# Altium PCB PCB.PcbDoc (part 3 of 4)
Units mm, origin at the board's own origin, x right, y up, seen from the top; angles counter-clockwise.
Board outline 90 x 90 mm, 4 copper layers (Top Layer (Signal), Int1 (GND), Int2 (Signal), Bottom Layer (Signal)), stack 1.586 mm thick; 151 components, 306 nets, 1178 pads, 350 vias.
Unrouted connection lines stored in the file: 80.
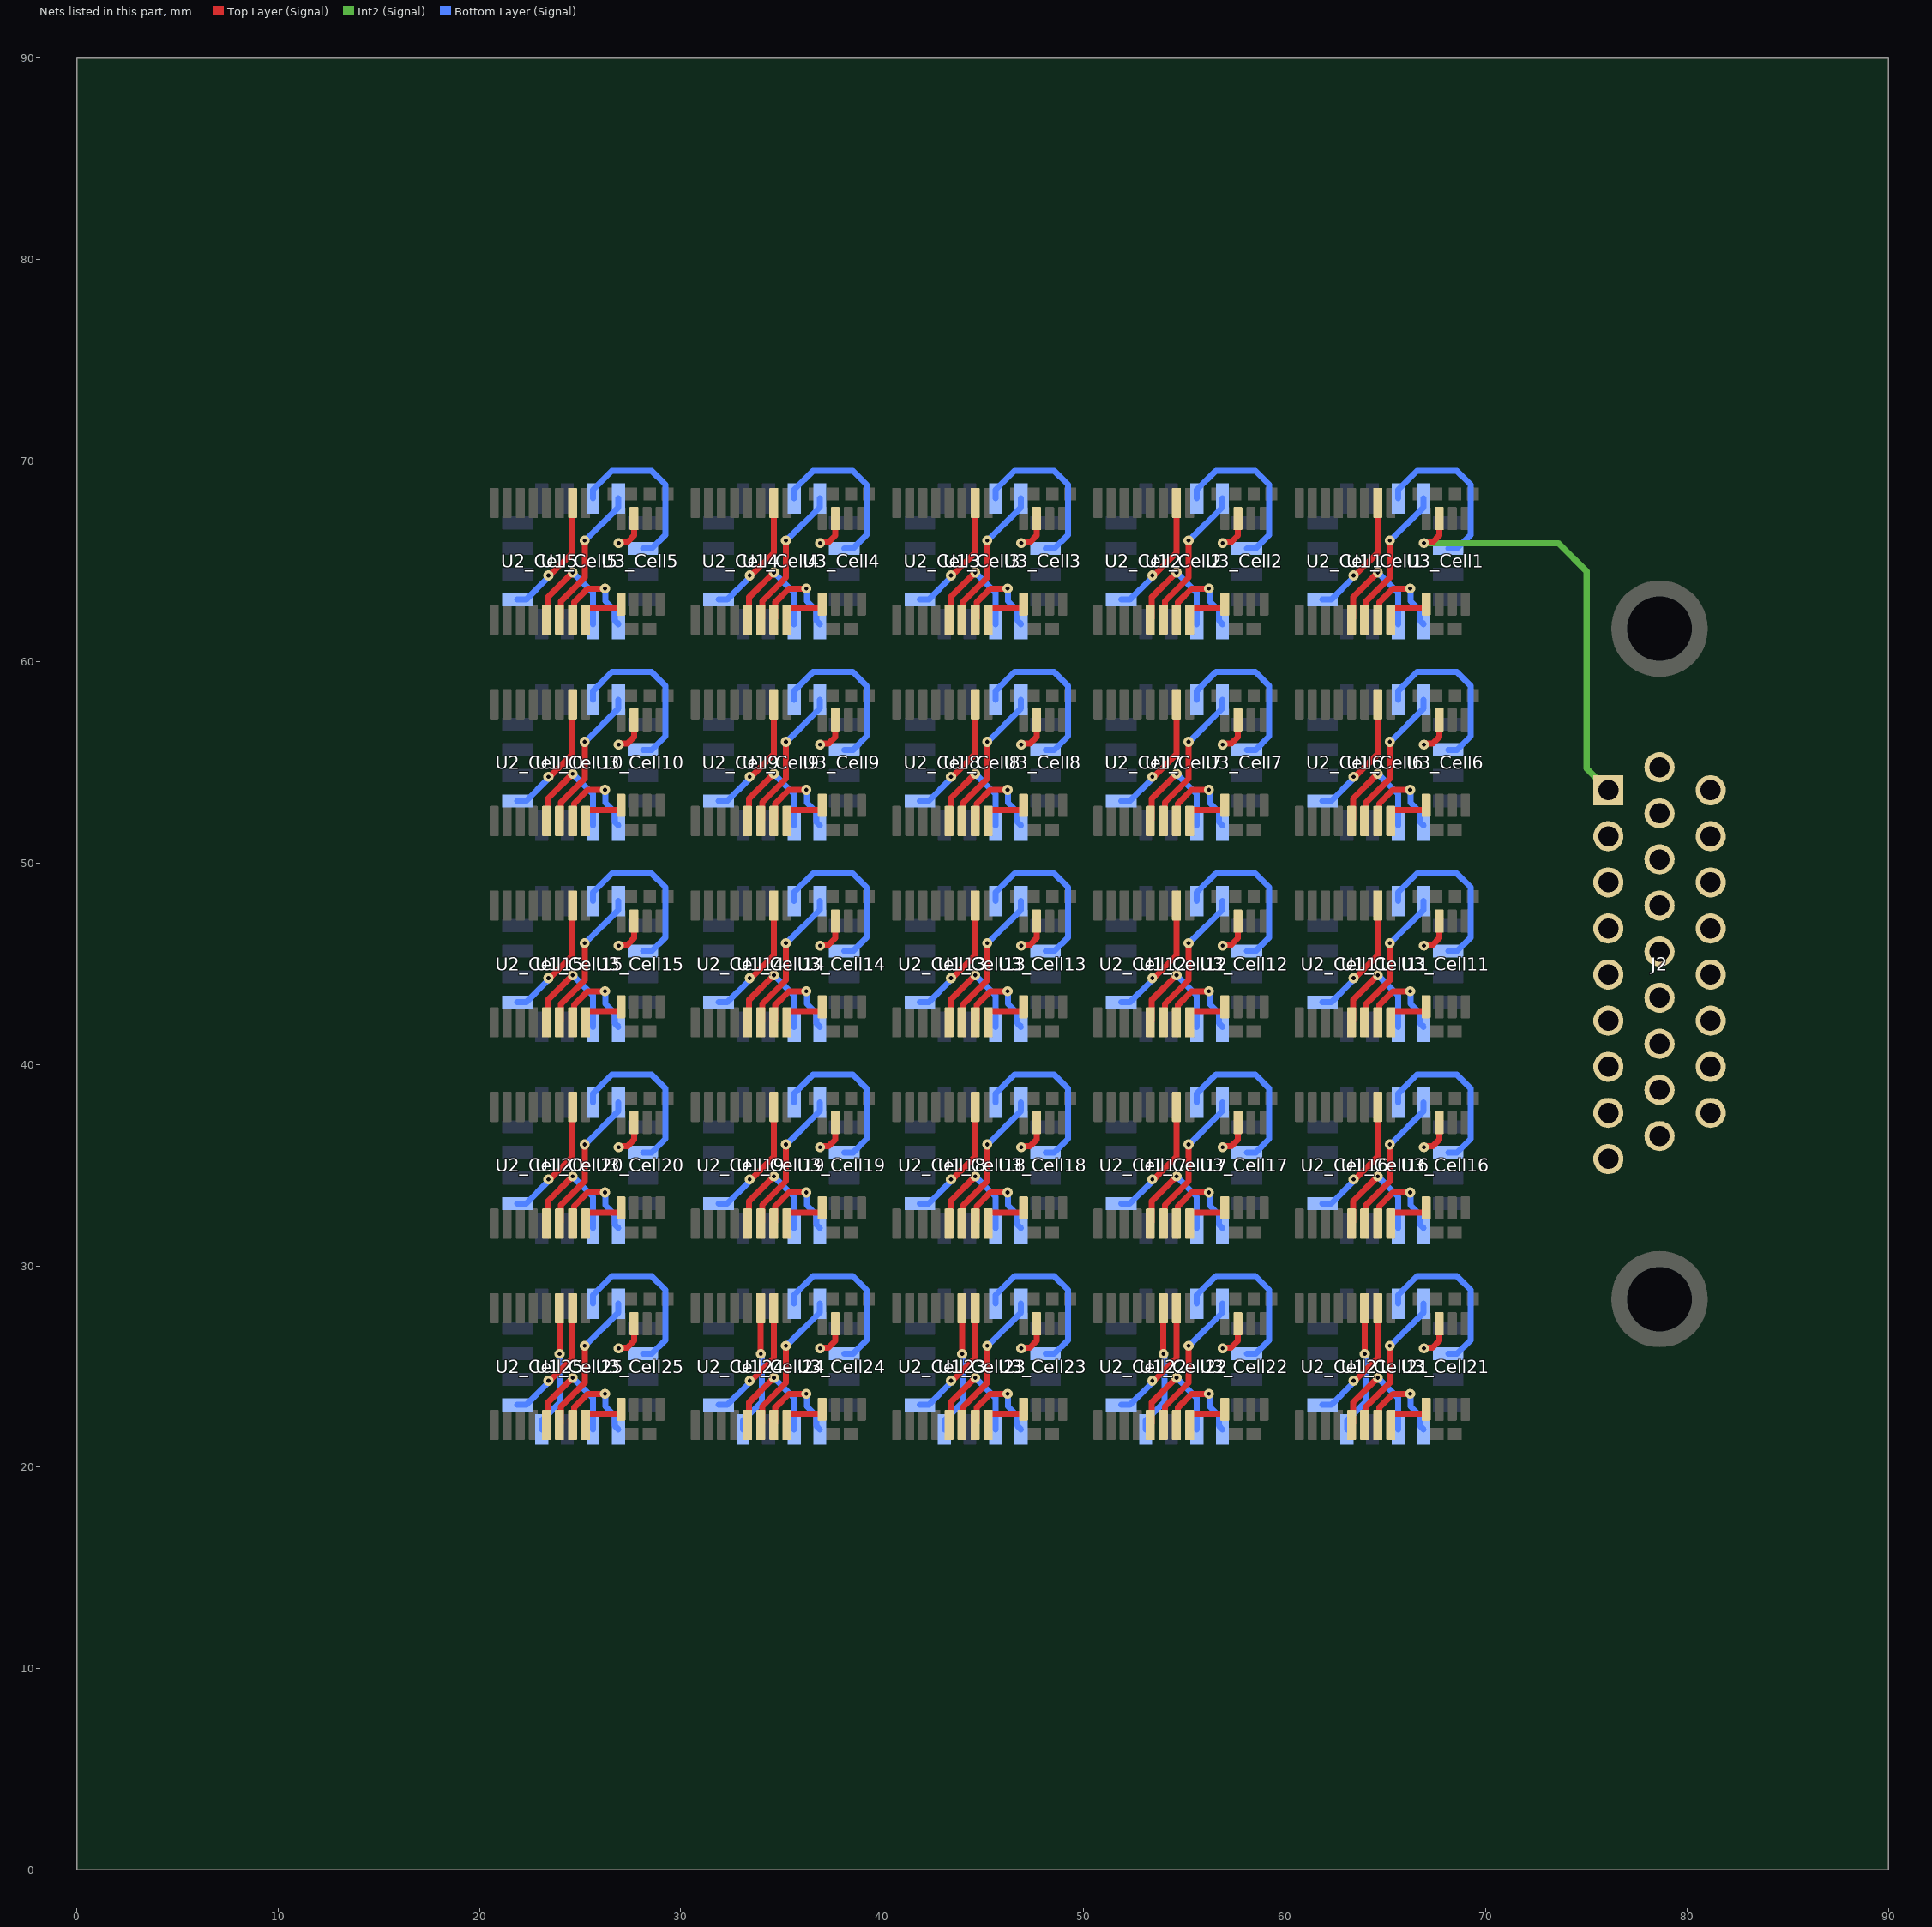
[diagram p5: the nets of this part, all layers, seen from the top]

## Via types
v1: diameter 0.5, hole 0.2, Top Layer (Signal) to Bottom Layer (Signal), 350 vias

## Nets (pads, with @x,y where several pads share a name; then routed paths per layer and width w, separated by ;. In a path a pad name is that pad's centre, name@x,y a point inside that pad or via, vN(x,y) a via of type N, cw(c..) or ccw(c..) an arc to the next point about the centre after c; other vN are vias at no path point) (continued)
OUT+B_Cell21: U1_Cell21.12 U2_Cell21.11 | length 6.4
  Top Layer (Signal) w0.3: v1(63.975,25.625) U2_Cell21.11@63.975,27.9
  Bottom Layer (Signal) w0.3: U1_Cell21.12@63.095,21.877 63.095,22.312 64.025,23.242 64.025,25.521 63.975,25.571 v1(63.975,25.625)
OUT+B_Cell22: U1_Cell22.12 U2_Cell22.11 | length 6.4
  Top Layer (Signal) w0.3: v1(53.975,25.625) U2_Cell22.11@53.975,27.9
  Bottom Layer (Signal) w0.3: U1_Cell22.12@53.095,21.877 53.095,22.312 54.025,23.242 54.025,25.521 53.975,25.571 v1(53.975,25.625)
OUT+B_Cell23: U1_Cell23.12 U2_Cell23.11 | length 6.4
  Top Layer (Signal) w0.3: v1(43.975,25.625) U2_Cell23.11@43.975,27.9
  Bottom Layer (Signal) w0.3: U1_Cell23.12@43.095,21.877 43.095,22.312 44.025,23.242 44.025,25.521 43.975,25.571 v1(43.975,25.625)
OUT+B_Cell24: U1_Cell24.12 U2_Cell24.11 | length 6.4
  Top Layer (Signal) w0.3: v1(33.975,25.625) U2_Cell24.11@33.975,27.9
  Bottom Layer (Signal) w0.3: U1_Cell24.12@33.095,21.877 33.095,22.312 34.025,23.242 34.025,25.521 33.975,25.571 v1(33.975,25.625)
OUT+B_Cell25: U1_Cell25.12 U2_Cell25.11 | length 6.4
  Top Layer (Signal) w0.3: v1(23.975,25.625) U2_Cell25.11@23.975,27.9
  Bottom Layer (Signal) w0.3: U1_Cell25.12@23.095,21.877 23.095,22.312 24.025,23.242 24.025,25.521 23.975,25.571 v1(23.975,25.625)
OUT+C_Cell1: U1_Cell1.13 U2_Cell1.10 | length 6.2
  Top Layer (Signal) w0.3: v1(63.425,64.3) 63.463,64.338 63.537,64.338 64.625,65.426 U2_Cell1.10@64.625,67.9
  Bottom Layer (Signal) w0.3: U1_Cell1.13@61.876,63.095 62.311,63.095 63.387,64.171 63.387,64.262 v1(63.425,64.3)
OUT+C_Cell2: U1_Cell2.13 U2_Cell2.10 | length 6.2
  Top Layer (Signal) w0.3: v1(53.425,64.3) 53.463,64.338 53.537,64.338 54.625,65.426 U2_Cell2.10@54.625,67.9
  Bottom Layer (Signal) w0.3: U1_Cell2.13@51.876,63.095 52.311,63.095 53.387,64.171 53.387,64.262 v1(53.425,64.3)
OUT+C_Cell3: U1_Cell3.13 U2_Cell3.10 | length 6.2
  Top Layer (Signal) w0.3: v1(43.425,64.3) 43.463,64.338 43.537,64.338 44.625,65.426 U2_Cell3.10@44.625,67.9
  Bottom Layer (Signal) w0.3: U1_Cell3.13@41.876,63.095 42.311,63.095 43.387,64.171 43.387,64.262 v1(43.425,64.3)
OUT+C_Cell4: U1_Cell4.13 U2_Cell4.10 | length 6.2
  Top Layer (Signal) w0.3: v1(33.425,64.3) 33.463,64.338 33.537,64.338 34.625,65.426 U2_Cell4.10@34.625,67.9
  Bottom Layer (Signal) w0.3: U1_Cell4.13@31.876,63.095 32.311,63.095 33.387,64.171 33.387,64.262 v1(33.425,64.3)
OUT+C_Cell5: U1_Cell5.13 U2_Cell5.10 | length 6.2
  Top Layer (Signal) w0.3: v1(23.425,64.3) 23.463,64.338 23.537,64.338 24.625,65.426 U2_Cell5.10@24.625,67.9
  Bottom Layer (Signal) w0.3: U1_Cell5.13@21.876,63.095 22.311,63.095 23.387,64.171 23.387,64.262 v1(23.425,64.3)
OUT+C_Cell6: U1_Cell6.13 U2_Cell6.10 | length 6.2
  Top Layer (Signal) w0.3: v1(63.425,54.3) 63.463,54.338 63.537,54.338 64.625,55.426 U2_Cell6.10@64.625,57.9
  Bottom Layer (Signal) w0.3: U1_Cell6.13@61.876,53.095 62.311,53.095 63.387,54.171 63.387,54.262 v1(63.425,54.3)
OUT+C_Cell7: U1_Cell7.13 U2_Cell7.10 | length 6.2
  Top Layer (Signal) w0.3: v1(53.425,54.3) 53.463,54.338 53.537,54.338 54.625,55.426 U2_Cell7.10@54.625,57.9
  Bottom Layer (Signal) w0.3: U1_Cell7.13@51.876,53.095 52.311,53.095 53.387,54.171 53.387,54.262 v1(53.425,54.3)
OUT+C_Cell8: U1_Cell8.13 U2_Cell8.10 | length 6.2
  Top Layer (Signal) w0.3: v1(43.425,54.3) 43.463,54.338 43.537,54.338 44.625,55.426 U2_Cell8.10@44.625,57.9
  Bottom Layer (Signal) w0.3: U1_Cell8.13@41.876,53.095 42.311,53.095 43.387,54.171 43.387,54.262 v1(43.425,54.3)
OUT+C_Cell9: U1_Cell9.13 U2_Cell9.10 | length 6.2
  Top Layer (Signal) w0.3: v1(33.425,54.3) 33.463,54.338 33.537,54.338 34.625,55.426 U2_Cell9.10@34.625,57.9
  Bottom Layer (Signal) w0.3: U1_Cell9.13@31.876,53.095 32.311,53.095 33.387,54.171 33.387,54.262 v1(33.425,54.3)
OUT+C_Cell10: U1_Cell10.13 U2_Cell10.10 | length 6.2
  Top Layer (Signal) w0.3: v1(23.425,54.3) 23.463,54.338 23.537,54.338 24.625,55.426 U2_Cell10.10@24.625,57.9
  Bottom Layer (Signal) w0.3: U1_Cell10.13@21.876,53.095 22.311,53.095 23.387,54.171 23.387,54.262 v1(23.425,54.3)
OUT+C_Cell11: U1_Cell11.13 U2_Cell11.10 | length 6.2
  Top Layer (Signal) w0.3: v1(63.425,44.3) 63.463,44.338 63.537,44.338 64.625,45.426 U2_Cell11.10@64.625,47.9
  Bottom Layer (Signal) w0.3: U1_Cell11.13@61.876,43.095 62.311,43.095 63.387,44.171 63.387,44.262 v1(63.425,44.3)
OUT+C_Cell12: U1_Cell12.13 U2_Cell12.10 | length 6.2
  Top Layer (Signal) w0.3: v1(53.425,44.3) 53.463,44.338 53.537,44.338 54.625,45.426 U2_Cell12.10@54.625,47.9
  Bottom Layer (Signal) w0.3: U1_Cell12.13@51.876,43.095 52.311,43.095 53.387,44.171 53.387,44.262 v1(53.425,44.3)
OUT+C_Cell13: U1_Cell13.13 U2_Cell13.10 | length 6.2
  Top Layer (Signal) w0.3: v1(43.425,44.3) 43.463,44.338 43.537,44.338 44.625,45.426 U2_Cell13.10@44.625,47.9
  Bottom Layer (Signal) w0.3: U1_Cell13.13@41.876,43.095 42.311,43.095 43.387,44.171 43.387,44.262 v1(43.425,44.3)
OUT+C_Cell14: U1_Cell14.13 U2_Cell14.10 | length 6.2
  Top Layer (Signal) w0.3: v1(33.425,44.3) 33.463,44.338 33.537,44.338 34.625,45.426 U2_Cell14.10@34.625,47.9
  Bottom Layer (Signal) w0.3: U1_Cell14.13@31.876,43.095 32.311,43.095 33.387,44.171 33.387,44.262 v1(33.425,44.3)
OUT+C_Cell15: U1_Cell15.13 U2_Cell15.10 | length 6.2
  Top Layer (Signal) w0.3: v1(23.425,44.3) 23.463,44.338 23.537,44.338 24.625,45.426 U2_Cell15.10@24.625,47.9
  Bottom Layer (Signal) w0.3: U1_Cell15.13@21.876,43.095 22.311,43.095 23.387,44.171 23.387,44.262 v1(23.425,44.3)
OUT+C_Cell16: U1_Cell16.13 U2_Cell16.10 | length 6.2
  Top Layer (Signal) w0.3: v1(63.425,34.3) 63.463,34.338 63.537,34.338 64.625,35.426 U2_Cell16.10@64.625,37.9
  Bottom Layer (Signal) w0.3: U1_Cell16.13@61.876,33.095 62.311,33.095 63.387,34.171 63.387,34.262 v1(63.425,34.3)
OUT+C_Cell17: U1_Cell17.13 U2_Cell17.10 | length 6.2
  Top Layer (Signal) w0.3: v1(53.425,34.3) 53.463,34.338 53.537,34.338 54.625,35.426 U2_Cell17.10@54.625,37.9
  Bottom Layer (Signal) w0.3: U1_Cell17.13@51.876,33.095 52.311,33.095 53.387,34.171 53.387,34.262 v1(53.425,34.3)
OUT+C_Cell18: U1_Cell18.13 U2_Cell18.10 | length 6.2
  Top Layer (Signal) w0.3: v1(43.425,34.3) 43.463,34.338 43.537,34.338 44.625,35.426 U2_Cell18.10@44.625,37.9
  Bottom Layer (Signal) w0.3: U1_Cell18.13@41.876,33.095 42.311,33.095 43.387,34.171 43.387,34.262 v1(43.425,34.3)
OUT+C_Cell19: U1_Cell19.13 U2_Cell19.10 | length 6.2
  Top Layer (Signal) w0.3: v1(33.425,34.3) 33.463,34.338 33.537,34.338 34.625,35.426 U2_Cell19.10@34.625,37.9
  Bottom Layer (Signal) w0.3: U1_Cell19.13@31.876,33.095 32.311,33.095 33.387,34.171 33.387,34.262 v1(33.425,34.3)
OUT+C_Cell20: U1_Cell20.13 U2_Cell20.10 | length 6.2
  Top Layer (Signal) w0.3: v1(23.425,34.3) 23.463,34.338 23.537,34.338 24.625,35.426 U2_Cell20.10@24.625,37.9
  Bottom Layer (Signal) w0.3: U1_Cell20.13@21.876,33.095 22.311,33.095 23.387,34.171 23.387,34.262 v1(23.425,34.3)
OUT+C_Cell21: U1_Cell21.13 U2_Cell21.10 | length 6.2
  Top Layer (Signal) w0.3: v1(63.425,24.3) 63.463,24.338 63.537,24.338 64.625,25.426 U2_Cell21.10@64.625,27.9
  Bottom Layer (Signal) w0.3: U1_Cell21.13@61.876,23.095 62.311,23.095 63.387,24.171 63.387,24.262 v1(63.425,24.3)
OUT+C_Cell22: U1_Cell22.13 U2_Cell22.10 | length 6.2
  Top Layer (Signal) w0.3: v1(53.425,24.3) 53.463,24.338 53.537,24.338 54.625,25.426 U2_Cell22.10@54.625,27.9
  Bottom Layer (Signal) w0.3: U1_Cell22.13@51.876,23.095 52.311,23.095 53.387,24.171 53.387,24.262 v1(53.425,24.3)
OUT+C_Cell23: U1_Cell23.13 U2_Cell23.10 | length 6.2
  Top Layer (Signal) w0.3: v1(43.425,24.3) 43.463,24.338 43.537,24.338 44.625,25.426 U2_Cell23.10@44.625,27.9
  Bottom Layer (Signal) w0.3: U1_Cell23.13@41.876,23.095 42.311,23.095 43.387,24.171 43.387,24.262 v1(43.425,24.3)
OUT+C_Cell24: U1_Cell24.13 U2_Cell24.10 | length 6.2
  Top Layer (Signal) w0.3: v1(33.425,24.3) 33.463,24.338 33.537,24.338 34.625,25.426 U2_Cell24.10@34.625,27.9
  Bottom Layer (Signal) w0.3: U1_Cell24.13@31.876,23.095 32.311,23.095 33.387,24.171 33.387,24.262 v1(33.425,24.3)
OUT+C_Cell25: U1_Cell25.13 U2_Cell25.10 | length 6.2
  Top Layer (Signal) w0.3: v1(23.425,24.3) 23.463,24.338 23.537,24.338 24.625,25.426 U2_Cell25.10@24.625,27.9
  Bottom Layer (Signal) w0.3: U1_Cell25.13@21.876,23.095 22.311,23.095 23.387,24.171 23.387,24.262 v1(23.425,24.3)
OUT-_Cell1: U2_Cell1.8 U3_Cell1.1 | length 2.4
  Top Layer (Signal) w0.3: U2_Cell1.8@65.275,62.1 65.275,62.576 65.35,62.651 66.95,62.651 67.025,62.726 U3_Cell1.1@67.025,62.875
OUT-_Cell2: U2_Cell2.8 U3_Cell2.1 | length 2.4
  Top Layer (Signal) w0.3: U2_Cell2.8@55.275,62.1 55.275,62.576 55.35,62.651 56.95,62.651 57.025,62.726 U3_Cell2.1@57.025,62.875
OUT-_Cell3: U2_Cell3.8 U3_Cell3.1 | length 2.4
  Top Layer (Signal) w0.3: U2_Cell3.8@45.275,62.1 45.275,62.576 45.35,62.651 46.95,62.651 47.025,62.726 U3_Cell3.1@47.025,62.875
OUT-_Cell4: U2_Cell4.8 U3_Cell4.1 | length 2.4
  Top Layer (Signal) w0.3: U2_Cell4.8@35.275,62.1 35.275,62.576 35.35,62.651 36.95,62.651 37.025,62.726 U3_Cell4.1@37.025,62.875
OUT-_Cell5: U2_Cell5.8 U3_Cell5.1 | length 2.4
  Top Layer (Signal) w0.3: U2_Cell5.8@25.275,62.1 25.275,62.576 25.35,62.651 26.95,62.651 27.025,62.726 U3_Cell5.1@27.025,62.875
OUT-_Cell6: U2_Cell6.8 U3_Cell6.1 | length 2.4
  Top Layer (Signal) w0.3: U2_Cell6.8@65.275,52.1 65.275,52.576 65.35,52.651 66.95,52.651 67.025,52.726 U3_Cell6.1@67.025,52.875
OUT-_Cell7: U2_Cell7.8 U3_Cell7.1 | length 2.4
  Top Layer (Signal) w0.3: U2_Cell7.8@55.275,52.1 55.275,52.576 55.35,52.651 56.95,52.651 57.025,52.726 U3_Cell7.1@57.025,52.875
OUT-_Cell8: U2_Cell8.8 U3_Cell8.1 | length 2.4
  Top Layer (Signal) w0.3: U2_Cell8.8@45.275,52.1 45.275,52.576 45.35,52.651 46.95,52.651 47.025,52.726 U3_Cell8.1@47.025,52.875
OUT-_Cell9: U2_Cell9.8 U3_Cell9.1 | length 2.4
  Top Layer (Signal) w0.3: U2_Cell9.8@35.275,52.1 35.275,52.576 35.35,52.651 36.95,52.651 37.025,52.726 U3_Cell9.1@37.025,52.875
OUT-_Cell10: U2_Cell10.8 U3_Cell10.1 | length 2.4
  Top Layer (Signal) w0.3: U2_Cell10.8@25.275,52.1 25.275,52.576 25.35,52.651 26.95,52.651 27.025,52.726 U3_Cell10.1@27.025,52.875
OUT-_Cell11: U2_Cell11.8 U3_Cell11.1 | length 2.4
  Top Layer (Signal) w0.3: U2_Cell11.8@65.275,42.1 65.275,42.576 65.35,42.651 66.95,42.651 67.025,42.726 U3_Cell11.1@67.025,42.875
OUT-_Cell12: U2_Cell12.8 U3_Cell12.1 | length 2.4
  Top Layer (Signal) w0.3: U2_Cell12.8@55.275,42.1 55.275,42.576 55.35,42.651 56.95,42.651 57.025,42.726 U3_Cell12.1@57.025,42.875
OUT-_Cell13: U2_Cell13.8 U3_Cell13.1 | length 2.4
  Top Layer (Signal) w0.3: U2_Cell13.8@45.275,42.1 45.275,42.576 45.35,42.651 46.95,42.651 47.025,42.726 U3_Cell13.1@47.025,42.875
OUT-_Cell14: U2_Cell14.8 U3_Cell14.1 | length 2.4
  Top Layer (Signal) w0.3: U2_Cell14.8@35.275,42.1 35.275,42.576 35.35,42.651 36.95,42.651 37.025,42.726 U3_Cell14.1@37.025,42.875
OUT-_Cell15: U2_Cell15.8 U3_Cell15.1 | length 2.4
  Top Layer (Signal) w0.3: U2_Cell15.8@25.275,42.1 25.275,42.576 25.35,42.651 26.95,42.651 27.025,42.726 U3_Cell15.1@27.025,42.875
OUT-_Cell16: U2_Cell16.8 U3_Cell16.1 | length 2.4
  Top Layer (Signal) w0.3: U2_Cell16.8@65.275,32.1 65.275,32.576 65.35,32.651 66.95,32.651 67.025,32.726 U3_Cell16.1@67.025,32.875
OUT-_Cell17: U2_Cell17.8 U3_Cell17.1 | length 2.4
  Top Layer (Signal) w0.3: U2_Cell17.8@55.275,32.1 55.275,32.576 55.35,32.651 56.95,32.651 57.025,32.726 U3_Cell17.1@57.025,32.875
OUT-_Cell18: U2_Cell18.8 U3_Cell18.1 | length 2.4
  Top Layer (Signal) w0.3: U2_Cell18.8@45.275,32.1 45.275,32.576 45.35,32.651 46.95,32.651 47.025,32.726 U3_Cell18.1@47.025,32.875
OUT-_Cell19: U2_Cell19.8 U3_Cell19.1 | length 2.4
  Top Layer (Signal) w0.3: U2_Cell19.8@35.275,32.1 35.275,32.576 35.35,32.651 36.95,32.651 37.025,32.726 U3_Cell19.1@37.025,32.875
OUT-_Cell20: U2_Cell20.8 U3_Cell20.1 | length 2.4
  Top Layer (Signal) w0.3: U2_Cell20.8@25.275,32.1 25.275,32.576 25.35,32.651 26.95,32.651 27.025,32.726 U3_Cell20.1@27.025,32.875
OUT-_Cell21: U2_Cell21.8 U3_Cell21.1 | length 2.4
  Top Layer (Signal) w0.3: U2_Cell21.8@65.275,22.1 65.275,22.576 65.35,22.651 66.95,22.651 67.025,22.726 U3_Cell21.1@67.025,22.875
OUT-_Cell22: U2_Cell22.8 U3_Cell22.1 | length 2.4
  Top Layer (Signal) w0.3: U2_Cell22.8@55.275,22.1 55.275,22.576 55.35,22.651 56.95,22.651 57.025,22.726 U3_Cell22.1@57.025,22.875
OUT-_Cell23: U2_Cell23.8 U3_Cell23.1 | length 2.4
  Top Layer (Signal) w0.3: U2_Cell23.8@45.275,22.1 45.275,22.576 45.35,22.651 46.95,22.651 47.025,22.726 U3_Cell23.1@47.025,22.875
OUT-_Cell24: U2_Cell24.8 U3_Cell24.1 | length 2.4
  Top Layer (Signal) w0.3: U2_Cell24.8@35.275,22.1 35.275,22.576 35.35,22.651 36.95,22.651 37.025,22.726 U3_Cell24.1@37.025,22.875
OUT-_Cell25: U2_Cell25.8 U3_Cell25.1 | length 2.4
  Top Layer (Signal) w0.3: U2_Cell25.8@25.275,22.1 25.275,22.576 25.35,22.651 26.95,22.651 27.025,22.726 U3_Cell25.1@27.025,22.875
OUT-A_Cell1: U1_Cell1.10 U2_Cell1.5 | length 5.9
  Top Layer (Signal) w0.3: U2_Cell1.5@63.325,62.1 63.4,62.175 63.4,63.222 v1(64.625,64.447)
  Bottom Layer (Signal) w0.3: v1(64.625,64.447) 65.635,63.437 U1_Cell1.10@65.635,61.877
OUT-A_Cell2: U1_Cell2.10 U2_Cell2.5 | length 5.9
  Top Layer (Signal) w0.3: U2_Cell2.5@53.325,62.1 53.4,62.175 53.4,63.222 v1(54.625,64.447)
  Bottom Layer (Signal) w0.3: v1(54.625,64.447) 55.635,63.437 U1_Cell2.10@55.635,61.877
OUT-A_Cell3: U1_Cell3.10 U2_Cell3.5 | length 5.9
  Top Layer (Signal) w0.3: U2_Cell3.5@43.325,62.1 43.4,62.175 43.4,63.222 v1(44.625,64.447)
  Bottom Layer (Signal) w0.3: v1(44.625,64.447) 45.635,63.437 U1_Cell3.10@45.635,61.877
OUT-A_Cell4: U1_Cell4.10 U2_Cell4.5 | length 5.9
  Top Layer (Signal) w0.3: U2_Cell4.5@33.325,62.1 33.4,62.175 33.4,63.222 v1(34.625,64.447)
  Bottom Layer (Signal) w0.3: v1(34.625,64.447) 35.635,63.437 U1_Cell4.10@35.635,61.877
OUT-A_Cell5: U1_Cell5.10 U2_Cell5.5 | length 5.9
  Top Layer (Signal) w0.3: U2_Cell5.5@23.325,62.1 23.4,62.175 23.4,63.222 v1(24.625,64.447)
  Bottom Layer (Signal) w0.3: v1(24.625,64.447) 25.635,63.437 U1_Cell5.10@25.635,61.877
OUT-A_Cell6: U1_Cell6.10 U2_Cell6.5 | length 5.9
  Top Layer (Signal) w0.3: U2_Cell6.5@63.325,52.1 63.4,52.175 63.4,53.222 v1(64.625,54.447)
  Bottom Layer (Signal) w0.3: v1(64.625,54.447) 65.635,53.437 U1_Cell6.10@65.635,51.877
OUT-A_Cell7: U1_Cell7.10 U2_Cell7.5 | length 5.9
  Top Layer (Signal) w0.3: U2_Cell7.5@53.325,52.1 53.4,52.175 53.4,53.222 v1(54.625,54.447)
  Bottom Layer (Signal) w0.3: v1(54.625,54.447) 55.635,53.437 U1_Cell7.10@55.635,51.877
OUT-A_Cell8: U1_Cell8.10 U2_Cell8.5 | length 5.9
  Top Layer (Signal) w0.3: U2_Cell8.5@43.325,52.1 43.4,52.175 43.4,53.222 v1(44.625,54.447)
  Bottom Layer (Signal) w0.3: v1(44.625,54.447) 45.635,53.437 U1_Cell8.10@45.635,51.877
OUT-A_Cell9: U1_Cell9.10 U2_Cell9.5 | length 5.9
  Top Layer (Signal) w0.3: U2_Cell9.5@33.325,52.1 33.4,52.175 33.4,53.222 v1(34.625,54.447)
  Bottom Layer (Signal) w0.3: v1(34.625,54.447) 35.635,53.437 U1_Cell9.10@35.635,51.877
OUT-A_Cell10: U1_Cell10.10 U2_Cell10.5 | length 5.9
  Top Layer (Signal) w0.3: U2_Cell10.5@23.325,52.1 23.4,52.175 23.4,53.222 v1(24.625,54.447)
  Bottom Layer (Signal) w0.3: v1(24.625,54.447) 25.635,53.437 U1_Cell10.10@25.635,51.877
OUT-A_Cell11: U1_Cell11.10 U2_Cell11.5 | length 5.9
  Top Layer (Signal) w0.3: U2_Cell11.5@63.325,42.1 63.4,42.175 63.4,43.222 v1(64.625,44.447)
  Bottom Layer (Signal) w0.3: v1(64.625,44.447) 65.635,43.437 U1_Cell11.10@65.635,41.877
OUT-A_Cell12: U1_Cell12.10 U2_Cell12.5 | length 5.9
  Top Layer (Signal) w0.3: U2_Cell12.5@53.325,42.1 53.4,42.175 53.4,43.222 v1(54.625,44.447)
  Bottom Layer (Signal) w0.3: v1(54.625,44.447) 55.635,43.437 U1_Cell12.10@55.635,41.877
OUT-A_Cell13: U1_Cell13.10 U2_Cell13.5 | length 5.9
  Top Layer (Signal) w0.3: U2_Cell13.5@43.325,42.1 43.4,42.175 43.4,43.222 v1(44.625,44.447)
  Bottom Layer (Signal) w0.3: v1(44.625,44.447) 45.635,43.437 U1_Cell13.10@45.635,41.877
OUT-A_Cell14: U1_Cell14.10 U2_Cell14.5 | length 5.9
  Top Layer (Signal) w0.3: U2_Cell14.5@33.325,42.1 33.4,42.175 33.4,43.222 v1(34.625,44.447)
  Bottom Layer (Signal) w0.3: v1(34.625,44.447) 35.635,43.437 U1_Cell14.10@35.635,41.877
OUT-A_Cell15: U1_Cell15.10 U2_Cell15.5 | length 5.9
  Top Layer (Signal) w0.3: U2_Cell15.5@23.325,42.1 23.4,42.175 23.4,43.222 v1(24.625,44.447)
  Bottom Layer (Signal) w0.3: v1(24.625,44.447) 25.635,43.437 U1_Cell15.10@25.635,41.877
OUT-A_Cell16: U1_Cell16.10 U2_Cell16.5 | length 5.9
  Top Layer (Signal) w0.3: U2_Cell16.5@63.325,32.1 63.4,32.175 63.4,33.222 v1(64.625,34.447)
  Bottom Layer (Signal) w0.3: v1(64.625,34.447) 65.635,33.437 U1_Cell16.10@65.635,31.877
OUT-A_Cell17: U1_Cell17.10 U2_Cell17.5 | length 5.9
  Top Layer (Signal) w0.3: U2_Cell17.5@53.325,32.1 53.4,32.175 53.4,33.222 v1(54.625,34.447)
  Bottom Layer (Signal) w0.3: v1(54.625,34.447) 55.635,33.437 U1_Cell17.10@55.635,31.877
OUT-A_Cell18: U1_Cell18.10 U2_Cell18.5 | length 5.9
  Top Layer (Signal) w0.3: U2_Cell18.5@43.325,32.1 43.4,32.175 43.4,33.222 v1(44.625,34.447)
  Bottom Layer (Signal) w0.3: v1(44.625,34.447) 45.635,33.437 U1_Cell18.10@45.635,31.877
OUT-A_Cell19: U1_Cell19.10 U2_Cell19.5 | length 5.9
  Top Layer (Signal) w0.3: U2_Cell19.5@33.325,32.1 33.4,32.175 33.4,33.222 v1(34.625,34.447)
  Bottom Layer (Signal) w0.3: v1(34.625,34.447) 35.635,33.437 U1_Cell19.10@35.635,31.877
OUT-A_Cell20: U1_Cell20.10 U2_Cell20.5 | length 5.9
  Top Layer (Signal) w0.3: U2_Cell20.5@23.325,32.1 23.4,32.175 23.4,33.222 v1(24.625,34.447)
  Bottom Layer (Signal) w0.3: v1(24.625,34.447) 25.635,33.437 U1_Cell20.10@25.635,31.877
OUT-A_Cell21: U1_Cell21.10 U2_Cell21.5 | length 5.9
  Top Layer (Signal) w0.3: U2_Cell21.5@63.325,22.1 63.4,22.175 63.4,23.222 v1(64.625,24.447)
  Bottom Layer (Signal) w0.3: v1(64.625,24.447) 65.635,23.437 U1_Cell21.10@65.635,21.877
OUT-A_Cell22: U1_Cell22.10 U2_Cell22.5 | length 5.9
  Top Layer (Signal) w0.3: U2_Cell22.5@53.325,22.1 53.4,22.175 53.4,23.222 v1(54.625,24.447)
  Bottom Layer (Signal) w0.3: v1(54.625,24.447) 55.635,23.437 U1_Cell22.10@55.635,21.877
OUT-A_Cell23: U1_Cell23.10 U2_Cell23.5 | length 5.9
  Top Layer (Signal) w0.3: U2_Cell23.5@43.325,22.1 43.4,22.175 43.4,23.222 v1(44.625,24.447)
  Bottom Layer (Signal) w0.3: v1(44.625,24.447) 45.635,23.437 U1_Cell23.10@45.635,21.877
OUT-A_Cell24: U1_Cell24.10 U2_Cell24.5 | length 5.9
  Top Layer (Signal) w0.3: U2_Cell24.5@33.325,22.1 33.4,22.175 33.4,23.222 v1(34.625,24.447)
  Bottom Layer (Signal) w0.3: v1(34.625,24.447) 35.635,23.437 U1_Cell24.10@35.635,21.877
OUT-A_Cell25: U1_Cell25.10 U2_Cell25.5 | length 5.9
  Top Layer (Signal) w0.3: U2_Cell25.5@23.325,22.1 23.4,22.175 23.4,23.222 v1(24.625,24.447)
  Bottom Layer (Signal) w0.3: v1(24.625,24.447) 25.635,23.437 U1_Cell25.10@25.635,21.877
OUT-B_Cell1: U1_Cell1.4 U2_Cell1.6 | length 7.3
  Top Layer (Signal) w0.3: U2_Cell1.6@63.975,62.1 64.05,62.175 64.05,63.023 65.225,64.198 v1(65.225,66.036)
  Bottom Layer (Signal) w0.3: v1(65.225,66.036) 65.253,66.036 66.905,67.688 U1_Cell1.4@66.905,68.123
OUT-B_Cell2: U1_Cell2.4 U2_Cell2.6 | length 7.3
  Top Layer (Signal) w0.3: U2_Cell2.6@53.975,62.1 54.05,62.175 54.05,63.023 55.225,64.198 v1(55.225,66.036)
  Bottom Layer (Signal) w0.3: v1(55.225,66.036) 55.253,66.036 56.905,67.688 U1_Cell2.4@56.905,68.123
OUT-B_Cell3: U1_Cell3.4 U2_Cell3.6 | length 7.3
  Top Layer (Signal) w0.3: U2_Cell3.6@43.975,62.1 44.05,62.175 44.05,63.023 45.225,64.198 v1(45.225,66.036)
  Bottom Layer (Signal) w0.3: v1(45.225,66.036) 45.253,66.036 46.905,67.688 U1_Cell3.4@46.905,68.123
OUT-B_Cell4: U1_Cell4.4 U2_Cell4.6 | length 7.3
  Top Layer (Signal) w0.3: U2_Cell4.6@33.975,62.1 34.05,62.175 34.05,63.023 35.225,64.198 v1(35.225,66.036)
  Bottom Layer (Signal) w0.3: v1(35.225,66.036) 35.253,66.036 36.905,67.688 U1_Cell4.4@36.905,68.123
OUT-B_Cell5: U1_Cell5.4 U2_Cell5.6 | length 7.3
  Top Layer (Signal) w0.3: U2_Cell5.6@23.975,62.1 24.05,62.175 24.05,63.023 25.225,64.198 v1(25.225,66.036)
  Bottom Layer (Signal) w0.3: v1(25.225,66.036) 25.253,66.036 26.905,67.688 U1_Cell5.4@26.905,68.123
OUT-B_Cell6: U1_Cell6.4 U2_Cell6.6 | length 7.3
  Top Layer (Signal) w0.3: U2_Cell6.6@63.975,52.1 64.05,52.175 64.05,53.023 65.225,54.198 v1(65.225,56.036)
  Bottom Layer (Signal) w0.3: v1(65.225,56.036) 65.253,56.036 66.905,57.688 U1_Cell6.4@66.905,58.123
OUT-B_Cell7: U1_Cell7.4 U2_Cell7.6 | length 7.3
  Top Layer (Signal) w0.3: U2_Cell7.6@53.975,52.1 54.05,52.175 54.05,53.023 55.225,54.198 v1(55.225,56.036)
  Bottom Layer (Signal) w0.3: v1(55.225,56.036) 55.253,56.036 56.905,57.688 U1_Cell7.4@56.905,58.123
OUT-B_Cell8: U1_Cell8.4 U2_Cell8.6 | length 7.3
  Top Layer (Signal) w0.3: U2_Cell8.6@43.975,52.1 44.05,52.175 44.05,53.023 45.225,54.198 v1(45.225,56.036)
  Bottom Layer (Signal) w0.3: v1(45.225,56.036) 45.253,56.036 46.905,57.688 U1_Cell8.4@46.905,58.123
OUT-B_Cell9: U1_Cell9.4 U2_Cell9.6 | length 7.3
  Top Layer (Signal) w0.3: U2_Cell9.6@33.975,52.1 34.05,52.175 34.05,53.023 35.225,54.198 v1(35.225,56.036)
  Bottom Layer (Signal) w0.3: v1(35.225,56.036) 35.253,56.036 36.905,57.688 U1_Cell9.4@36.905,58.123
OUT-B_Cell10: U1_Cell10.4 U2_Cell10.6 | length 7.3
  Top Layer (Signal) w0.3: U2_Cell10.6@23.975,52.1 24.05,52.175 24.05,53.023 25.225,54.198 v1(25.225,56.036)
  Bottom Layer (Signal) w0.3: v1(25.225,56.036) 25.253,56.036 26.905,57.688 U1_Cell10.4@26.905,58.123
OUT-B_Cell11: U1_Cell11.4 U2_Cell11.6 | length 7.3
  Top Layer (Signal) w0.3: U2_Cell11.6@63.975,42.1 64.05,42.175 64.05,43.023 65.225,44.198 v1(65.225,46.036)
  Bottom Layer (Signal) w0.3: v1(65.225,46.036) 65.253,46.036 66.905,47.688 U1_Cell11.4@66.905,48.123
OUT-B_Cell12: U1_Cell12.4 U2_Cell12.6 | length 7.3
  Top Layer (Signal) w0.3: U2_Cell12.6@53.975,42.1 54.05,42.175 54.05,43.023 55.225,44.198 v1(55.225,46.036)
  Bottom Layer (Signal) w0.3: v1(55.225,46.036) 55.253,46.036 56.905,47.688 U1_Cell12.4@56.905,48.123
OUT-B_Cell13: U1_Cell13.4 U2_Cell13.6 | length 7.3
  Top Layer (Signal) w0.3: U2_Cell13.6@43.975,42.1 44.05,42.175 44.05,43.023 45.225,44.198 v1(45.225,46.036)
  Bottom Layer (Signal) w0.3: v1(45.225,46.036) 45.253,46.036 46.905,47.688 U1_Cell13.4@46.905,48.123
OUT-B_Cell14: U1_Cell14.4 U2_Cell14.6 | length 7.3
  Top Layer (Signal) w0.3: U2_Cell14.6@33.975,42.1 34.05,42.175 34.05,43.023 35.225,44.198 v1(35.225,46.036)
  Bottom Layer (Signal) w0.3: v1(35.225,46.036) 35.253,46.036 36.905,47.688 U1_Cell14.4@36.905,48.123
OUT-B_Cell15: U1_Cell15.4 U2_Cell15.6 | length 7.3
  Top Layer (Signal) w0.3: U2_Cell15.6@23.975,42.1 24.05,42.175 24.05,43.023 25.225,44.198 v1(25.225,46.036)
  Bottom Layer (Signal) w0.3: v1(25.225,46.036) 25.253,46.036 26.905,47.688 U1_Cell15.4@26.905,48.123
OUT-B_Cell16: U1_Cell16.4 U2_Cell16.6 | length 7.3
  Top Layer (Signal) w0.3: U2_Cell16.6@63.975,32.1 64.05,32.175 64.05,33.023 65.225,34.198 v1(65.225,36.036)
  Bottom Layer (Signal) w0.3: v1(65.225,36.036) 65.253,36.036 66.905,37.688 U1_Cell16.4@66.905,38.123
OUT-B_Cell17: U1_Cell17.4 U2_Cell17.6 | length 7.3
  Top Layer (Signal) w0.3: U2_Cell17.6@53.975,32.1 54.05,32.175 54.05,33.023 55.225,34.198 v1(55.225,36.036)
  Bottom Layer (Signal) w0.3: v1(55.225,36.036) 55.253,36.036 56.905,37.688 U1_Cell17.4@56.905,38.123
OUT-B_Cell18: U1_Cell18.4 U2_Cell18.6 | length 7.3
  Top Layer (Signal) w0.3: U2_Cell18.6@43.975,32.1 44.05,32.175 44.05,33.023 45.225,34.198 v1(45.225,36.036)
  Bottom Layer (Signal) w0.3: v1(45.225,36.036) 45.253,36.036 46.905,37.688 U1_Cell18.4@46.905,38.123
OUT-B_Cell19: U1_Cell19.4 U2_Cell19.6 | length 7.3
  Top Layer (Signal) w0.3: U2_Cell19.6@33.975,32.1 34.05,32.175 34.05,33.023 35.225,34.198 v1(35.225,36.036)
  Bottom Layer (Signal) w0.3: v1(35.225,36.036) 35.253,36.036 36.905,37.688 U1_Cell19.4@36.905,38.123
OUT-B_Cell20: U1_Cell20.4 U2_Cell20.6 | length 7.3
  Top Layer (Signal) w0.3: U2_Cell20.6@23.975,32.1 24.05,32.175 24.05,33.023 25.225,34.198 v1(25.225,36.036)
  Bottom Layer (Signal) w0.3: v1(25.225,36.036) 25.253,36.036 26.905,37.688 U1_Cell20.4@26.905,38.123
OUT-B_Cell21: U1_Cell21.4 U2_Cell21.6 | length 7.3
  Top Layer (Signal) w0.3: U2_Cell21.6@63.975,22.1 64.05,22.175 64.05,23.023 65.225,24.198 v1(65.225,26.036)
  Bottom Layer (Signal) w0.3: v1(65.225,26.036) 65.253,26.036 66.905,27.688 U1_Cell21.4@66.905,28.123
OUT-B_Cell22: U1_Cell22.4 U2_Cell22.6 | length 7.3
  Top Layer (Signal) w0.3: U2_Cell22.6@53.975,22.1 54.05,22.175 54.05,23.023 55.225,24.198 v1(55.225,26.036)
  Bottom Layer (Signal) w0.3: v1(55.225,26.036) 55.253,26.036 56.905,27.688 U1_Cell22.4@56.905,28.123
OUT-B_Cell23: U1_Cell23.4 U2_Cell23.6 | length 7.3
  Top Layer (Signal) w0.3: U2_Cell23.6@43.975,22.1 44.05,22.175 44.05,23.023 45.225,24.198 v1(45.225,26.036)
  Bottom Layer (Signal) w0.3: v1(45.225,26.036) 45.253,26.036 46.905,27.688 U1_Cell23.4@46.905,28.123
OUT-B_Cell24: U1_Cell24.4 U2_Cell24.6 | length 7.3
  Top Layer (Signal) w0.3: U2_Cell24.6@33.975,22.1 34.05,22.175 34.05,23.023 35.225,24.198 v1(35.225,26.036)
  Bottom Layer (Signal) w0.3: v1(35.225,26.036) 35.253,26.036 36.905,27.688 U1_Cell24.4@36.905,28.123
OUT-B_Cell25: U1_Cell25.4 U2_Cell25.6 | length 7.3
  Top Layer (Signal) w0.3: U2_Cell25.6@23.975,22.1 24.05,22.175 24.05,23.023 25.225,24.198 v1(25.225,26.036)
  Bottom Layer (Signal) w0.3: v1(25.225,26.036) 25.253,26.036 26.905,27.688 U1_Cell25.4@26.905,28.123
OUT-C_Cell1: U1_Cell1.9 U2_Cell1.7 | length 4.8
  Top Layer (Signal) w0.3: U2_Cell1.7@64.625,62.1 64.7,62.175 64.7,62.966 65.375,63.641 66.226,63.641 v1(66.235,63.65)
  Bottom Layer (Signal) w0.3: v1(66.235,63.65) 66.263,63.622 66.263,63.012 66.73,62.545 66.73,62.052 U1_Cell1.9@66.905,61.877
OUT-C_Cell2: U1_Cell2.9 U2_Cell2.7 | length 4.8
  Top Layer (Signal) w0.3: U2_Cell2.7@54.625,62.1 54.7,62.175 54.7,62.966 55.375,63.641 56.226,63.641 v1(56.235,63.65)
  Bottom Layer (Signal) w0.3: v1(56.235,63.65) 56.263,63.622 56.263,63.012 56.73,62.545 56.73,62.052 U1_Cell2.9@56.905,61.877
OUT-C_Cell3: U1_Cell3.9 U2_Cell3.7 | length 4.8
  Top Layer (Signal) w0.3: U2_Cell3.7@44.625,62.1 44.7,62.175 44.7,62.966 45.375,63.641 46.226,63.641 v1(46.235,63.65)
  Bottom Layer (Signal) w0.3: v1(46.235,63.65) 46.263,63.622 46.263,63.012 46.73,62.545 46.73,62.052 U1_Cell3.9@46.905,61.877
OUT-C_Cell4: U1_Cell4.9 U2_Cell4.7 | length 4.8
  Top Layer (Signal) w0.3: U2_Cell4.7@34.625,62.1 34.7,62.175 34.7,62.966 35.375,63.641 36.226,63.641 v1(36.235,63.65)
  Bottom Layer (Signal) w0.3: v1(36.235,63.65) 36.263,63.622 36.263,63.012 36.73,62.545 36.73,62.052 U1_Cell4.9@36.905,61.877
OUT-C_Cell5: U1_Cell5.9 U2_Cell5.7 | length 4.8
  Top Layer (Signal) w0.3: U2_Cell5.7@24.625,62.1 24.7,62.175 24.7,62.966 25.375,63.641 26.226,63.641 v1(26.235,63.65)
  Bottom Layer (Signal) w0.3: v1(26.235,63.65) 26.263,63.622 26.263,63.012 26.73,62.545 26.73,62.052 U1_Cell5.9@26.905,61.877
OUT-C_Cell6: U1_Cell6.9 U2_Cell6.7 | length 4.8
  Top Layer (Signal) w0.3: U2_Cell6.7@64.625,52.1 64.7,52.175 64.7,52.966 65.375,53.641 66.226,53.641 v1(66.235,53.65)
  Bottom Layer (Signal) w0.3: v1(66.235,53.65) 66.263,53.622 66.263,53.012 66.73,52.545 66.73,52.052 U1_Cell6.9@66.905,51.877
OUT-C_Cell7: U1_Cell7.9 U2_Cell7.7 | length 4.8
  Top Layer (Signal) w0.3: U2_Cell7.7@54.625,52.1 54.7,52.175 54.7,52.966 55.375,53.641 56.226,53.641 v1(56.235,53.65)
  Bottom Layer (Signal) w0.3: v1(56.235,53.65) 56.263,53.622 56.263,53.012 56.73,52.545 56.73,52.052 U1_Cell7.9@56.905,51.877
OUT-C_Cell8: U1_Cell8.9 U2_Cell8.7 | length 4.8
  Top Layer (Signal) w0.3: U2_Cell8.7@44.625,52.1 44.7,52.175 44.7,52.966 45.375,53.641 46.226,53.641 v1(46.235,53.65)
  Bottom Layer (Signal) w0.3: v1(46.235,53.65) 46.263,53.622 46.263,53.012 46.73,52.545 46.73,52.052 U1_Cell8.9@46.905,51.877
OUT-C_Cell9: U1_Cell9.9 U2_Cell9.7 | length 4.8
  Top Layer (Signal) w0.3: U2_Cell9.7@34.625,52.1 34.7,52.175 34.7,52.966 35.375,53.641 36.226,53.641 v1(36.235,53.65)
  Bottom Layer (Signal) w0.3: v1(36.235,53.65) 36.263,53.622 36.263,53.012 36.73,52.545 36.73,52.052 U1_Cell9.9@36.905,51.877
OUT-C_Cell10: U1_Cell10.9 U2_Cell10.7 | length 4.8
  Top Layer (Signal) w0.3: U2_Cell10.7@24.625,52.1 24.7,52.175 24.7,52.966 25.375,53.641 26.226,53.641 v1(26.235,53.65)
  Bottom Layer (Signal) w0.3: v1(26.235,53.65) 26.263,53.622 26.263,53.012 26.73,52.545 26.73,52.052 U1_Cell10.9@26.905,51.877
OUT-C_Cell11: U1_Cell11.9 U2_Cell11.7 | length 4.8
  Top Layer (Signal) w0.3: U2_Cell11.7@64.625,42.1 64.7,42.175 64.7,42.966 65.375,43.641 66.226,43.641 v1(66.235,43.65)
  Bottom Layer (Signal) w0.3: v1(66.235,43.65) 66.263,43.622 66.263,43.012 66.73,42.545 66.73,42.052 U1_Cell11.9@66.905,41.877
OUT-C_Cell12: U1_Cell12.9 U2_Cell12.7 | length 4.8
  Top Layer (Signal) w0.3: U2_Cell12.7@54.625,42.1 54.7,42.175 54.7,42.966 55.375,43.641 56.226,43.641 v1(56.235,43.65)
  Bottom Layer (Signal) w0.3: v1(56.235,43.65) 56.263,43.622 56.263,43.012 56.73,42.545 56.73,42.052 U1_Cell12.9@56.905,41.877
OUT-C_Cell13: U1_Cell13.9 U2_Cell13.7 | length 4.8
  Top Layer (Signal) w0.3: U2_Cell13.7@44.625,42.1 44.7,42.175 44.7,42.966 45.375,43.641 46.226,43.641 v1(46.235,43.65)
  Bottom Layer (Signal) w0.3: v1(46.235,43.65) 46.263,43.622 46.263,43.012 46.73,42.545 46.73,42.052 U1_Cell13.9@46.905,41.877
OUT-C_Cell14: U1_Cell14.9 U2_Cell14.7 | length 4.8
  Top Layer (Signal) w0.3: U2_Cell14.7@34.625,42.1 34.7,42.175 34.7,42.966 35.375,43.641 36.226,43.641 v1(36.235,43.65)
  Bottom Layer (Signal) w0.3: v1(36.235,43.65) 36.263,43.622 36.263,43.012 36.73,42.545 36.73,42.052 U1_Cell14.9@36.905,41.877
OUT-C_Cell15: U1_Cell15.9 U2_Cell15.7 | length 4.8
  Top Layer (Signal) w0.3: U2_Cell15.7@24.625,42.1 24.7,42.175 24.7,42.966 25.375,43.641 26.226,43.641 v1(26.235,43.65)
  Bottom Layer (Signal) w0.3: v1(26.235,43.65) 26.263,43.622 26.263,43.012 26.73,42.545 26.73,42.052 U1_Cell15.9@26.905,41.877
OUT-C_Cell16: U1_Cell16.9 U2_Cell16.7 | length 4.8
  Top Layer (Signal) w0.3: U2_Cell16.7@64.625,32.1 64.7,32.175 64.7,32.966 65.375,33.641 66.226,33.641 v1(66.235,33.65)
  Bottom Layer (Signal) w0.3: v1(66.235,33.65) 66.263,33.622 66.263,33.012 66.73,32.545 66.73,32.052 U1_Cell16.9@66.905,31.877
OUT-C_Cell17: U1_Cell17.9 U2_Cell17.7 | length 4.8
  Top Layer (Signal) w0.3: U2_Cell17.7@54.625,32.1 54.7,32.175 54.7,32.966 55.375,33.641 56.226,33.641 v1(56.235,33.65)
  Bottom Layer (Signal) w0.3: v1(56.235,33.65) 56.263,33.622 56.263,33.012 56.73,32.545 56.73,32.052 U1_Cell17.9@56.905,31.877
OUT-C_Cell18: U1_Cell18.9 U2_Cell18.7 | length 4.8
  Top Layer (Signal) w0.3: U2_Cell18.7@44.625,32.1 44.7,32.175 44.7,32.966 45.375,33.641 46.226,33.641 v1(46.235,33.65)
  Bottom Layer (Signal) w0.3: v1(46.235,33.65) 46.263,33.622 46.263,33.012 46.73,32.545 46.73,32.052 U1_Cell18.9@46.905,31.877
OUT-C_Cell19: U1_Cell19.9 U2_Cell19.7 | length 4.8
  Top Layer (Signal) w0.3: U2_Cell19.7@34.625,32.1 34.7,32.175 34.7,32.966 35.375,33.641 36.226,33.641 v1(36.235,33.65)
  Bottom Layer (Signal) w0.3: v1(36.235,33.65) 36.263,33.622 36.263,33.012 36.73,32.545 36.73,32.052 U1_Cell19.9@36.905,31.877
OUT-C_Cell20: U1_Cell20.9 U2_Cell20.7 | length 4.8
  Top Layer (Signal) w0.3: U2_Cell20.7@24.625,32.1 24.7,32.175 24.7,32.966 25.375,33.641 26.226,33.641 v1(26.235,33.65)
  Bottom Layer (Signal) w0.3: v1(26.235,33.65) 26.263,33.622 26.263,33.012 26.73,32.545 26.73,32.052 U1_Cell20.9@26.905,31.877
OUT-C_Cell21: U1_Cell21.9 U2_Cell21.7 | length 4.8
  Top Layer (Signal) w0.3: U2_Cell21.7@64.625,22.1 64.7,22.175 64.7,22.966 65.375,23.641 66.226,23.641 v1(66.235,23.65)
  Bottom Layer (Signal) w0.3: v1(66.235,23.65) 66.263,23.622 66.263,23.012 66.73,22.545 66.73,22.052 U1_Cell21.9@66.905,21.877
OUT-C_Cell22: U1_Cell22.9 U2_Cell22.7 | length 4.8
  Top Layer (Signal) w0.3: U2_Cell22.7@54.625,22.1 54.7,22.175 54.7,22.966 55.375,23.641 56.226,23.641 v1(56.235,23.65)
  Bottom Layer (Signal) w0.3: v1(56.235,23.65) 56.263,23.622 56.263,23.012 56.73,22.545 56.73,22.052 U1_Cell22.9@56.905,21.877
OUT-C_Cell23: U1_Cell23.9 U2_Cell23.7 | length 4.8
  Top Layer (Signal) w0.3: U2_Cell23.7@44.625,22.1 44.7,22.175 44.7,22.966 45.375,23.641 46.226,23.641 v1(46.235,23.65)
  Bottom Layer (Signal) w0.3: v1(46.235,23.65) 46.263,23.622 46.263,23.012 46.73,22.545 46.73,22.052 U1_Cell23.9@46.905,21.877
OUT-C_Cell24: U1_Cell24.9 U2_Cell24.7 | length 4.8
  Top Layer (Signal) w0.3: U2_Cell24.7@34.625,22.1 34.7,22.175 34.7,22.966 35.375,23.641 36.226,23.641 v1(36.235,23.65)
  Bottom Layer (Signal) w0.3: v1(36.235,23.65) 36.263,23.622 36.263,23.012 36.73,22.545 36.73,22.052 U1_Cell24.9@36.905,21.877
OUT-C_Cell25: U1_Cell25.9 U2_Cell25.7 | length 4.8
  Top Layer (Signal) w0.3: U2_Cell25.7@24.625,22.1 24.7,22.175 24.7,22.966 25.375,23.641 26.226,23.641 v1(26.235,23.65)
  Bottom Layer (Signal) w0.3: v1(26.235,23.65) 26.263,23.622 26.263,23.012 26.73,22.545 26.73,22.052 U1_Cell25.9@26.905,21.877
OUT_Cell1: J2.1 U3_Cell1.7 | length 21.7
  Top Layer (Signal) w0.3: v1(66.914,65.9) 66.952,65.938 67.338,65.938 67.675,66.275 U3_Cell1.7@67.675,67.125
  Int2 (Signal) w0.3: v1(66.914,65.9) 73.6,65.9 75,64.5 75,54.71 J2.1@76.08,53.63
OUT_Cell2: J2.2 U3_Cell2.7 | length 1.8
  Top Layer (Signal) w0.3: v1(56.914,65.9) 56.952,65.938 57.338,65.938 57.675,66.275 U3_Cell2.7@57.675,67.125
OUT_Cell3: J2.3 U3_Cell3.7 | length 1.8
  Top Layer (Signal) w0.3: v1(46.914,65.9) 46.952,65.938 47.338,65.938 47.675,66.275 U3_Cell3.7@47.675,67.125
OUT_Cell4: J2.4 U3_Cell4.7 | length 1.8
  Top Layer (Signal) w0.3: v1(36.914,65.9) 36.952,65.938 37.338,65.938 37.675,66.275 U3_Cell4.7@37.675,67.125
OUT_Cell5: J2.5 U3_Cell5.7 | length 1.8
  Top Layer (Signal) w0.3: v1(26.914,65.9) 26.952,65.938 27.338,65.938 27.675,66.275 U3_Cell5.7@27.675,67.125
OUT_Cell6: J2.6 U3_Cell6.7 | length 1.8
  Top Layer (Signal) w0.3: v1(66.914,55.9) 66.952,55.938 67.338,55.938 67.675,56.275 U3_Cell6.7@67.675,57.125
OUT_Cell7: J2.7 U3_Cell7.7 | length 1.8
  Top Layer (Signal) w0.3: v1(56.914,55.9) 56.952,55.938 57.338,55.938 57.675,56.275 U3_Cell7.7@57.675,57.125
OUT_Cell8: J2.8 U3_Cell8.7 | length 1.8
  Top Layer (Signal) w0.3: v1(46.914,55.9) 46.952,55.938 47.338,55.938 47.675,56.275 U3_Cell8.7@47.675,57.125
OUT_Cell9: J2.9 U3_Cell9.7 | length 1.8
  Top Layer (Signal) w0.3: v1(36.914,55.9) 36.952,55.938 37.338,55.938 37.675,56.275 U3_Cell9.7@37.675,57.125
OUT_Cell10: J2.10 U3_Cell10.7 | length 1.8
  Top Layer (Signal) w0.3: v1(26.914,55.9) 26.952,55.938 27.338,55.938 27.675,56.275 U3_Cell10.7@27.675,57.125
OUT_Cell11: J2.11 U3_Cell11.7 | length 1.8
  Top Layer (Signal) w0.3: v1(66.914,45.9) 66.952,45.938 67.338,45.938 67.675,46.275 U3_Cell11.7@67.675,47.125
OUT_Cell12: J2.12 U3_Cell12.7 | length 1.8
  Top Layer (Signal) w0.3: v1(56.914,45.9) 56.952,45.938 57.338,45.938 57.675,46.275 U3_Cell12.7@57.675,47.125
OUT_Cell13: J2.13 U3_Cell13.7 | length 1.8
  Top Layer (Signal) w0.3: v1(46.914,45.9) 46.952,45.938 47.338,45.938 47.675,46.275 U3_Cell13.7@47.675,47.125
OUT_Cell14: J2.14 U3_Cell14.7 | length 1.8
  Top Layer (Signal) w0.3: v1(36.914,45.9) 36.952,45.938 37.338,45.938 37.675,46.275 U3_Cell14.7@37.675,47.125
OUT_Cell15: J2.15 U3_Cell15.7 | length 1.8
  Top Layer (Signal) w0.3: v1(26.914,45.9) 26.952,45.938 27.338,45.938 27.675,46.275 U3_Cell15.7@27.675,47.125
OUT_Cell16: J2.16 U3_Cell16.7 | length 1.8
  Top Layer (Signal) w0.3: v1(66.914,35.9) 66.952,35.938 67.338,35.938 67.675,36.275 U3_Cell16.7@67.675,37.125
OUT_Cell17: J2.17 U3_Cell17.7 | length 1.8
  Top Layer (Signal) w0.3: v1(56.914,35.9) 56.952,35.938 57.338,35.938 57.675,36.275 U3_Cell17.7@57.675,37.125
OUT_Cell18: J2.18 U3_Cell18.7 | length 1.8
  Top Layer (Signal) w0.3: v1(46.914,35.9) 46.952,35.938 47.338,35.938 47.675,36.275 U3_Cell18.7@47.675,37.125
OUT_Cell19: J2.19 U3_Cell19.7 | length 1.8
  Top Layer (Signal) w0.3: v1(36.914,35.9) 36.952,35.938 37.338,35.938 37.675,36.275 U3_Cell19.7@37.675,37.125
OUT_Cell20: J2.20 U3_Cell20.7 | length 1.8
  Top Layer (Signal) w0.3: v1(26.914,35.9) 26.952,35.938 27.338,35.938 27.675,36.275 U3_Cell20.7@27.675,37.125
OUT_Cell21: J2.21 U3_Cell21.7 | length 1.8
  Top Layer (Signal) w0.3: v1(66.914,25.9) 66.952,25.938 67.338,25.938 67.675,26.275 U3_Cell21.7@67.675,27.125
OUT_Cell22: J2.22 U3_Cell22.7 | length 1.8
  Top Layer (Signal) w0.3: v1(56.914,25.9) 56.952,25.938 57.338,25.938 57.675,26.275 U3_Cell22.7@57.675,27.125
OUT_Cell23: J2.23 U3_Cell23.7 | length 1.8
  Top Layer (Signal) w0.3: v1(46.914,25.9) 46.952,25.938 47.338,25.938 47.675,26.275 U3_Cell23.7@47.675,27.125
OUT_Cell24: J2.24 U3_Cell24.7 | length 1.8
  Top Layer (Signal) w0.3: v1(36.914,25.9) 36.952,25.938 37.338,25.938 37.675,26.275 U3_Cell24.7@37.675,27.125
OUT_Cell25: J2.25 U3_Cell25.7 | length 1.8
  Top Layer (Signal) w0.3: v1(26.914,25.9) 26.952,25.938 27.338,25.938 27.675,26.275 U3_Cell25.7@27.675,27.125
S/R_Cell1: U1_Cell1.3 U1_Cell1.6 | length 8.6
  Bottom Layer (Signal) w0.3: U1_Cell1.3@65.635,68.123 65.635,68.558 66.577,69.5 68.549,69.5 69.234,68.815 69.234,66.31 68.559,65.635 U1_Cell1.6@68.124,65.635
S/R_Cell2: U1_Cell2.3 U1_Cell2.6 | length 8.6
  Bottom Layer (Signal) w0.3: U1_Cell2.3@55.635,68.123 55.635,68.558 56.577,69.5 58.549,69.5 59.234,68.815 59.234,66.31 58.559,65.635 U1_Cell2.6@58.124,65.635
S/R_Cell3: U1_Cell3.3 U1_Cell3.6 | length 8.6
  Bottom Layer (Signal) w0.3: U1_Cell3.3@45.635,68.123 45.635,68.558 46.577,69.5 48.549,69.5 49.234,68.815 49.234,66.31 48.559,65.635 U1_Cell3.6@48.124,65.635
S/R_Cell4: U1_Cell4.3 U1_Cell4.6 | length 8.6
  Bottom Layer (Signal) w0.3: U1_Cell4.3@35.635,68.123 35.635,68.558 36.577,69.5 38.549,69.5 39.234,68.815 39.234,66.31 38.559,65.635 U1_Cell4.6@38.124,65.635
S/R_Cell5: U1_Cell5.3 U1_Cell5.6 | length 8.6
  Bottom Layer (Signal) w0.3: U1_Cell5.3@25.635,68.123 25.635,68.558 26.577,69.5 28.549,69.5 29.234,68.815 29.234,66.31 28.559,65.635 U1_Cell5.6@28.124,65.635
S/R_Cell6: U1_Cell6.3 U1_Cell6.6 | length 8.6
  Bottom Layer (Signal) w0.3: U1_Cell6.3@65.635,58.123 65.635,58.558 66.577,59.5 68.549,59.5 69.234,58.815 69.234,56.31 68.559,55.635 U1_Cell6.6@68.124,55.635
S/R_Cell7: U1_Cell7.3 U1_Cell7.6 | length 8.6
  Bottom Layer (Signal) w0.3: U1_Cell7.3@55.635,58.123 55.635,58.558 56.577,59.5 58.549,59.5 59.234,58.815 59.234,56.31 58.559,55.635 U1_Cell7.6@58.124,55.635
S/R_Cell8: U1_Cell8.3 U1_Cell8.6 | length 8.6
  Bottom Layer (Signal) w0.3: U1_Cell8.3@45.635,58.123 45.635,58.558 46.577,59.5 48.549,59.5 49.234,58.815 49.234,56.31 48.559,55.635 U1_Cell8.6@48.124,55.635
S/R_Cell9: U1_Cell9.3 U1_Cell9.6 | length 8.6
  Bottom Layer (Signal) w0.3: U1_Cell9.3@35.635,58.123 35.635,58.558 36.577,59.5 38.549,59.5 39.234,58.815 39.234,56.31 38.559,55.635 U1_Cell9.6@38.124,55.635
S/R_Cell10: U1_Cell10.3 U1_Cell10.6 | length 8.6
  Bottom Layer (Signal) w0.3: U1_Cell10.3@25.635,58.123 25.635,58.558 26.577,59.5 28.549,59.5 29.234,58.815 29.234,56.31 28.559,55.635 U1_Cell10.6@28.124,55.635
S/R_Cell11: U1_Cell11.3 U1_Cell11.6 | length 8.6
  Bottom Layer (Signal) w0.3: U1_Cell11.3@65.635,48.123 65.635,48.558 66.577,49.5 68.549,49.5 69.234,48.815 69.234,46.31 68.559,45.635 U1_Cell11.6@68.124,45.635
S/R_Cell12: U1_Cell12.3 U1_Cell12.6 | length 8.6
  Bottom Layer (Signal) w0.3: U1_Cell12.3@55.635,48.123 55.635,48.558 56.577,49.5 58.549,49.5 59.234,48.815 59.234,46.31 58.559,45.635 U1_Cell12.6@58.124,45.635
S/R_Cell13: U1_Cell13.3 U1_Cell13.6 | length 8.6
  Bottom Layer (Signal) w0.3: U1_Cell13.3@45.635,48.123 45.635,48.558 46.577,49.5 48.549,49.5 49.234,48.815 49.234,46.31 48.559,45.635 U1_Cell13.6@48.124,45.635
S/R_Cell14: U1_Cell14.3 U1_Cell14.6 | length 8.6
  Bottom Layer (Signal) w0.3: U1_Cell14.3@35.635,48.123 35.635,48.558 36.577,49.5 38.549,49.5 39.234,48.815 39.234,46.31 38.559,45.635 U1_Cell14.6@38.124,45.635
S/R_Cell15: U1_Cell15.3 U1_Cell15.6 | length 8.6
  Bottom Layer (Signal) w0.3: U1_Cell15.3@25.635,48.123 25.635,48.558 26.577,49.5 28.549,49.5 29.234,48.815 29.234,46.31 28.559,45.635 U1_Cell15.6@28.124,45.635
S/R_Cell16: U1_Cell16.3 U1_Cell16.6 | length 8.6
  Bottom Layer (Signal) w0.3: U1_Cell16.3@65.635,38.123 65.635,38.558 66.577,39.5 68.549,39.5 69.234,38.815 69.234,36.31 68.559,35.635 U1_Cell16.6@68.124,35.635
S/R_Cell17: U1_Cell17.3 U1_Cell17.6 | length 8.6
  Bottom Layer (Signal) w0.3: U1_Cell17.3@55.635,38.123 55.635,38.558 56.577,39.5 58.549,39.5 59.234,38.815 59.234,36.31 58.559,35.635 U1_Cell17.6@58.124,35.635
S/R_Cell18: U1_Cell18.3 U1_Cell18.6 | length 8.6
  Bottom Layer (Signal) w0.3: U1_Cell18.3@45.635,38.123 45.635,38.558 46.577,39.5 48.549,39.5 49.234,38.815 49.234,36.31 48.559,35.635 U1_Cell18.6@48.124,35.635
S/R_Cell19: U1_Cell19.3 U1_Cell19.6 | length 8.6
  Bottom Layer (Signal) w0.3: U1_Cell19.3@35.635,38.123 35.635,38.558 36.577,39.5 38.549,39.5 39.234,38.815 39.234,36.31 38.559,35.635 U1_Cell19.6@38.124,35.635
S/R_Cell20: U1_Cell20.3 U1_Cell20.6 | length 8.6
  Bottom Layer (Signal) w0.3: U1_Cell20.3@25.635,38.123 25.635,38.558 26.577,39.5 28.549,39.5 29.234,38.815 29.234,36.31 28.559,35.635 U1_Cell20.6@28.124,35.635
S/R_Cell21: U1_Cell21.3 U1_Cell21.6 | length 8.6
  Bottom Layer (Signal) w0.3: U1_Cell21.3@65.635,28.123 65.635,28.558 66.577,29.5 68.549,29.5 69.234,28.815 69.234,26.31 68.559,25.635 U1_Cell21.6@68.124,25.635
S/R_Cell22: U1_Cell22.3 U1_Cell22.6 | length 8.6
  Bottom Layer (Signal) w0.3: U1_Cell22.3@55.635,28.123 55.635,28.558 56.577,29.5 58.549,29.5 59.234,28.815 59.234,26.31 58.559,25.635 U1_Cell22.6@58.124,25.635
S/R_Cell23: U1_Cell23.3 U1_Cell23.6 | length 8.6
  Bottom Layer (Signal) w0.3: U1_Cell23.3@45.635,28.123 45.635,28.558 46.577,29.5 48.549,29.5 49.234,28.815 49.234,26.31 48.559,25.635 U1_Cell23.6@48.124,25.635
S/R_Cell24: U1_Cell24.3 U1_Cell24.6 | length 8.6
  Bottom Layer (Signal) w0.3: U1_Cell24.3@35.635,28.123 35.635,28.558 36.577,29.5 38.549,29.5 39.234,28.815 39.234,26.31 38.559,25.635 U1_Cell24.6@38.124,25.635
S/R_Cell25: U1_Cell25.3 U1_Cell25.6 | length 8.6
  Bottom Layer (Signal) w0.3: U1_Cell25.3@25.635,28.123 25.635,28.558 26.577,29.5 28.549,29.5 29.234,28.815 29.234,26.31 28.559,25.635 U1_Cell25.6@28.124,25.635
UART_RX: J2.26